# Altium PCB pcb.PcbDoc
Units mm, origin at the board's own origin, x right, y up, seen from the top; angles counter-clockwise.
Board outline 152.4 x 101.6 mm, 2 copper layers (Top Layer, Bottom Layer); 10 components, 5 nets, 23 pads, 0 vias.
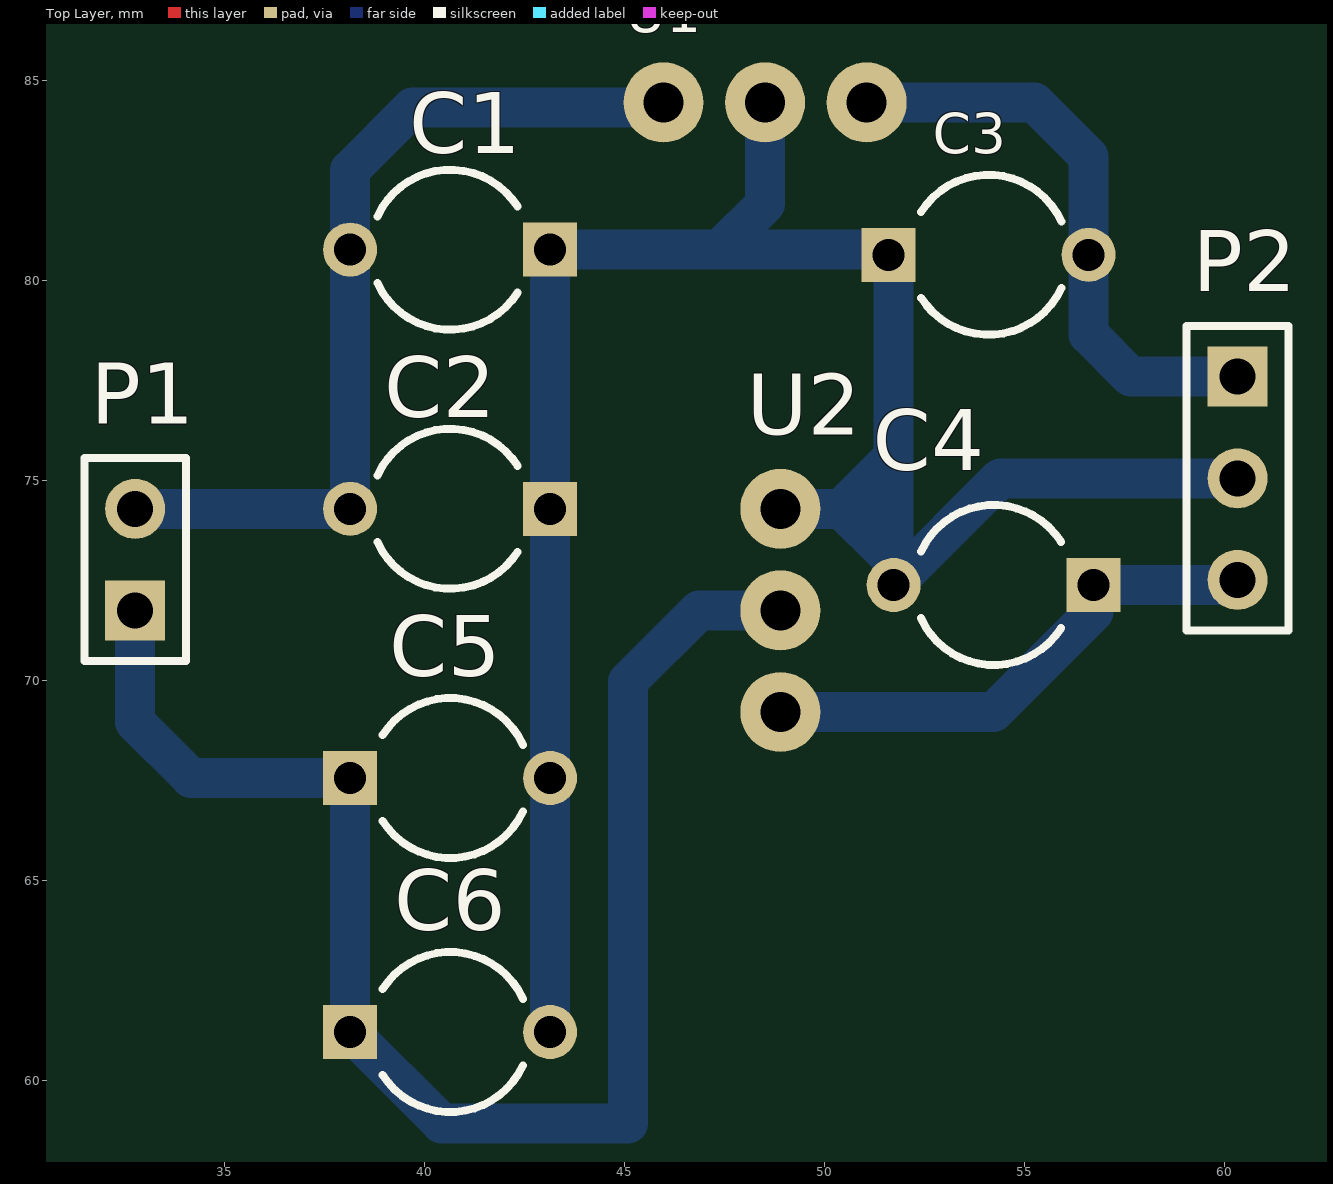
[diagram p0: Top Layer view]
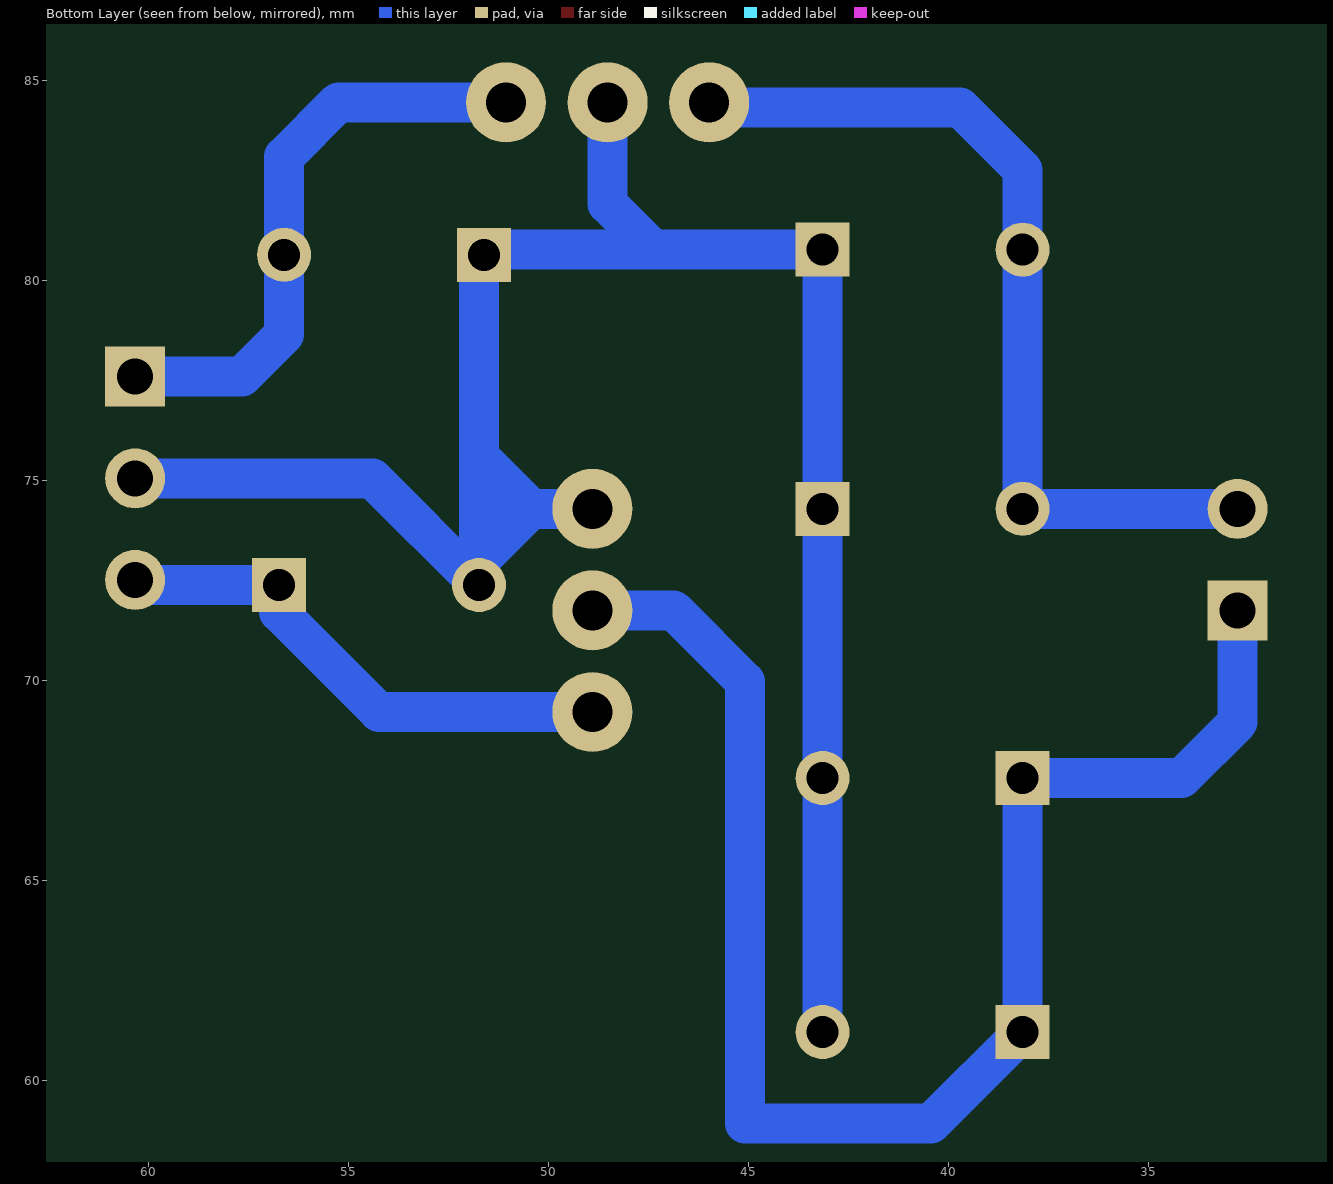
[diagram p1: Bottom Layer view, seen from below]

## Layer stack, top to bottom
Top Solder: solder mask 0.0102, Solder Resist, Dk 3.5
Top Layer: signal copper 0.0356
Dielectric 1: dielectric 0.32, FR-4, Dk 4.8
Bottom Layer: signal copper 0.0356
Bottom Solder: solder mask 0.0102, Solder Resist, Dk 3.5

## Board outline
25.4,25.4 177.8,25.4 177.8,127 25.4,127

## Design rules (kind name [scope] priority, off if disabled: settings)
Clearance [All] p1: gap=0.5 ignorepadtopadclearanceinfootprint=FALSE
PolygonConnect [All] p1: connectstyle=Relief reliefconductorwidth=0.254 reliefentries=4 polygonreliefangle="90 Angle" airgapwidth=0.254
RoutingVias [All] p1: holewidth=0.711 width=1.27 viastyle="Through Hole" minholewidth=0.711 minwidth=1.27 maxholewidth=0.711 maxwidth=1.27
SolderMaskExpansion [All] p1: expansion=0.102
Width [All] p1: maxlimit=2 minlimit=0.5 preferedwidth=1
30 further rules are at their usual default settings.

## Components (designator, comment, footprint, x,y, rotation, side; value= is the part's Value field where it differs from the comment)
C1 "Cap2" CAPR5-4X5 40.64,80.772 r180 top value=2200uF
C2 "Cap2" CAPR5-4X5 40.64,74.295 r180 top value=0.1uF
C3 "Cap2" CAPR5-4X5 54.102,80.645 r0 top value=0.1uF
C4 "Cap2" CAPR5-4X5 54.229,72.39 r180 top value=0.1uF
C5 "Cap2" CAPR5-4X5 40.64,67.564 r0 top value=2200uF
C6 "Cap2" CAPR5-4X5 40.64,61.214 r0 top value=0.1uF
P1 "Header 2" HDR1X2 32.766,71.755 r90 top
P2 "Header 3" HDR1X3 60.325,77.597 r270 top
U1 "LM7805" LM7805 45.974,84.455 r0 top
U2 "LM7905" LM7905 48.895,74.295 r270 top

## Footprints (in the part's own frame and the unit in brackets; to place one, negate y for a bottom-side part, rotate by r counter-clockwise, add the part's x,y. Pads: shape width x height; smd on the part's side, far side on the other; paste and mask are expansions set on the pad)
CAPR5-4X5 [mm] "Capacitor; 2 Leads"
  rect 1.35x1.35 hole 0.8: 1(-2.5,0)
  round 1.35 hole 0.8: 2(2.5,0)
  silkscreen extent -1.69,-2 1.82,2
HDR1X2 [mm] "Connector; Header; 2 Position"
  rect 1.5x1.5 hole 0.9: 1(0,0)
  round 1.5 hole 0.9: 2(2.54,0)
  silkscreen extent -1.27,-1.27 3.81,1.27
HDR1X3 [mm] "Connector; Header; 3 Position"
  rect 1.5x1.5 hole 0.9: 1(0,0)
  round 1.5 hole 0.9: 2(2.54,0) 3(5.08,0)
  silkscreen extent -1.27,-1.27 6.35,1.27
LM7805 [mm]
  round 2 hole 1: 1(0,0) 2(2.54,0) 3(5.08,0)
LM7905 [mm]
  round 2 hole 1: 1(0,0) 2(2.54,0) 3(5.08,0)

## Part data
C1 C2 C3 C4 C5 C6: "Capacitor", PackageDescription="Capacitor; 2 Leads", PackageReference=CAPR5-4X5, Published=23-Sep-2002, Publisher="Altium Limited"
P1: "Header, 2-Pin", LatestRevisionDate=17-Jul-2002, LatestRevisionNote="Re-released for DXP Platform.", Publisher="Altium Limited"
P2: "Header, 3-Pin", LatestRevisionDate=17-Jul-2002, LatestRevisionNote="Re-released for DXP Platform.", Publisher="Altium Limited"

## Nets (pads, with @x,y where several pads share a name; then routed paths per layer and width w, separated by ;. In a path a pad name is that pad's centre, name@x,y a point inside that pad or via, vN(x,y) a via of type N, cw(c..) or ccw(c..) an arc to the next point about the centre after c; other vN are vias at no path point)
GND: C1.1 C2.1 C3.1 C4.2 C5.2 C6.2 P2.2 U1.2 U2.1 | length 56.6
  Bottom Layer w1: C6.2 C5.2 C2.1 C1.1 47.371,80.772 ; U1.2 48.514,81.915 47.371,80.772 ; U2.1@49.149,74.549 49.403,74.295 50.419,74.295 ; P2.2 54.396,75.057 C4.2 51.729,73.152 ; 47.371,80.772 51.475,80.772 C3.1 51.729,80.518 51.729,75.605 ; 50.419,74.295 51.729,75.605 ; 50.419,74.295 51.729,74.295 ; 50.419,74.295 51.562,73.152 51.729,73.152 ; 51.729,73.152 51.729,74.295 ; 51.729,74.295 51.729,75.605
NetC1_2: C1.2 C2.2 P1.2 U1.1 | length 22.4
  Bottom Layer w1: P1.2 C2.2 C1.2 38.14,82.764 39.704,84.328 45.847,84.328 U1.1
NetC3_2: C3.2 P2.1 U1.3 | length 14.7
  Bottom Layer w1: U1.3 55.245,84.455 56.602,83.098 C3.2 56.602,78.653 57.658,77.597 P2.1
NetC4_1: C4.1 P2.3 U2.3 | length 13
  Bottom Layer w1: U2.3@49.149,69.469 49.403,69.215 54.229,69.215 56.729,71.715 C4.1 60.198,72.39 P2.3
NetC5_1: C5.1 C6.1 P1.1 U2.2 | length 38.6
  Bottom Layer w1: P1.1 32.766,68.961 34.163,67.564 38.013,67.564 C5.1@38.14,67.437 ; C5.1 C5.1@38.14,67.437 ; U2.2 46.863,71.755 45.085,69.977 45.085,58.928 40.426,58.928 C6.1 C5.1@38.14,67.437